# EAGLE board Questão 2 (EAGLE 7.6.0)

Size 56.82 x 53.33 mm. Coordinates in mm from the lower left corner, seen from the top.
Outline: 0,0 56.82,0 56.82,53.33 0,53.33 0,0
Copper layers (1*16): Top 0.035mm / dielectric 1.5mm / Bottom 0.035mm
Design rules "default": minimum track width 10mil, minimum drill 24mil, track to track 8mil, track to pad 8mil, pad to pad 8mil, via to via 8mil, smd to smd 8mil, copper to edge 40mil, drill to drill 8mil, minimum pad ring 10mil, minimum via ring 8mil, stop-mask expansion 4mil, vias tented up to drill 0mil, thermal gap 10mil

## Footprints (pad centres in the part's own frame; a part is rotated, then mirrored left to right if it is on the bottom)
LED5MM = drill 0.813 octagon: A -1.27,0; K 1.27,0
0207/10 = drill 0.813 octagon: 1 -5.08,0; 2 5.08,0
TL1105 = drill 1 pad 1.676: 1 -2.25,3.25; 2 2.25,3.25; 3 -2.25,-3.25; 4 2.25,-3.25
1X3P-2.54-2.54-11.6-3.0-BLACK-MALE = drill 0.889 pad 1.651 square: 1 0,2.54 | drill 0.889 pad 1.651: 2 0,0; 3 0,-2.54

## Placement (x,y rotation side)
D1  [LED5MM]  5,98.98 0 top  (outside the outline)
D2  [LED5MM]  5,124.38 0 top  (outside the outline)
D3  [LED5MM]  5,137.08 0 top  (outside the outline)
R1  10k‎Ω  [0207/10]  5,60.88 0 top  (outside the outline)
R2  220‎Ω  [0207/10]  5,73.58 0 top  (outside the outline)
R3  10k‎Ω  [0207/10]  5,86.28 0 top  (outside the outline)
R4  220‎Ω  [0207/10]  5,111.68 0 top  (outside the outline)
R5  220‎Ω  [0207/10]  5,149.78 0 top  (outside the outline)
R6  220‎Ω  [0207/10]  5,162.48 0 top  (outside the outline)
S1  [TL1105]  5,22.78 0 top
S2  [TL1105]  5,35.48 0 top
S3  [TL1105]  5,48.18 0 top
SERVO1  [1X3P-2.54-2.54-11.6-3.0-BLACK-MALE]  5,10.08 0 top

## Library data of the parts
D1-D3 R1-R6 S1-S3 SERVO1 = AUTODESK_CIRCUITS_BREADBOARD

## Nets
N$1: SERVO1.3
N$2: S1.4 S2.4 S3.4 SERVO1.2
N$3: R1.1 R2.1 R3.1 R4.1 R5.1 R6.1 SERVO1.1
N$4: S1.1
N$5: R1.2 S1.3
N$6: S1.2
N$7: S2.1
N$8: R2.2 S2.3
N$9: S2.2
N$10: S3.1
N$11: R3.2 S3.3
N$12: S3.2
N$13: D1.K R4.2
N$14: D1.A
N$15: D2.K R6.2
N$16: D2.A
N$17: D3.K R5.2
N$18: D3.A

## Tracks (layer width: path | path; a pad name or v marks a point on that pad's centre or on a via)
N$2  (3 unrouted)
N$3  (6 unrouted)
N$5  (1 unrouted)
N$8  (1 unrouted)
N$11  (1 unrouted)
N$13  (1 unrouted)
N$15  (1 unrouted)
N$17  (1 unrouted)